# Altium PCB PCB1.PcbDoc
Units mil, origin at the board's own origin, x right, y up, seen from the top; angles counter-clockwise.
Board outline 3100 x 3000 mil, 2 copper layers (Top Layer, Bottom Layer); 61 components, 45 nets, 259 pads, 32 vias.
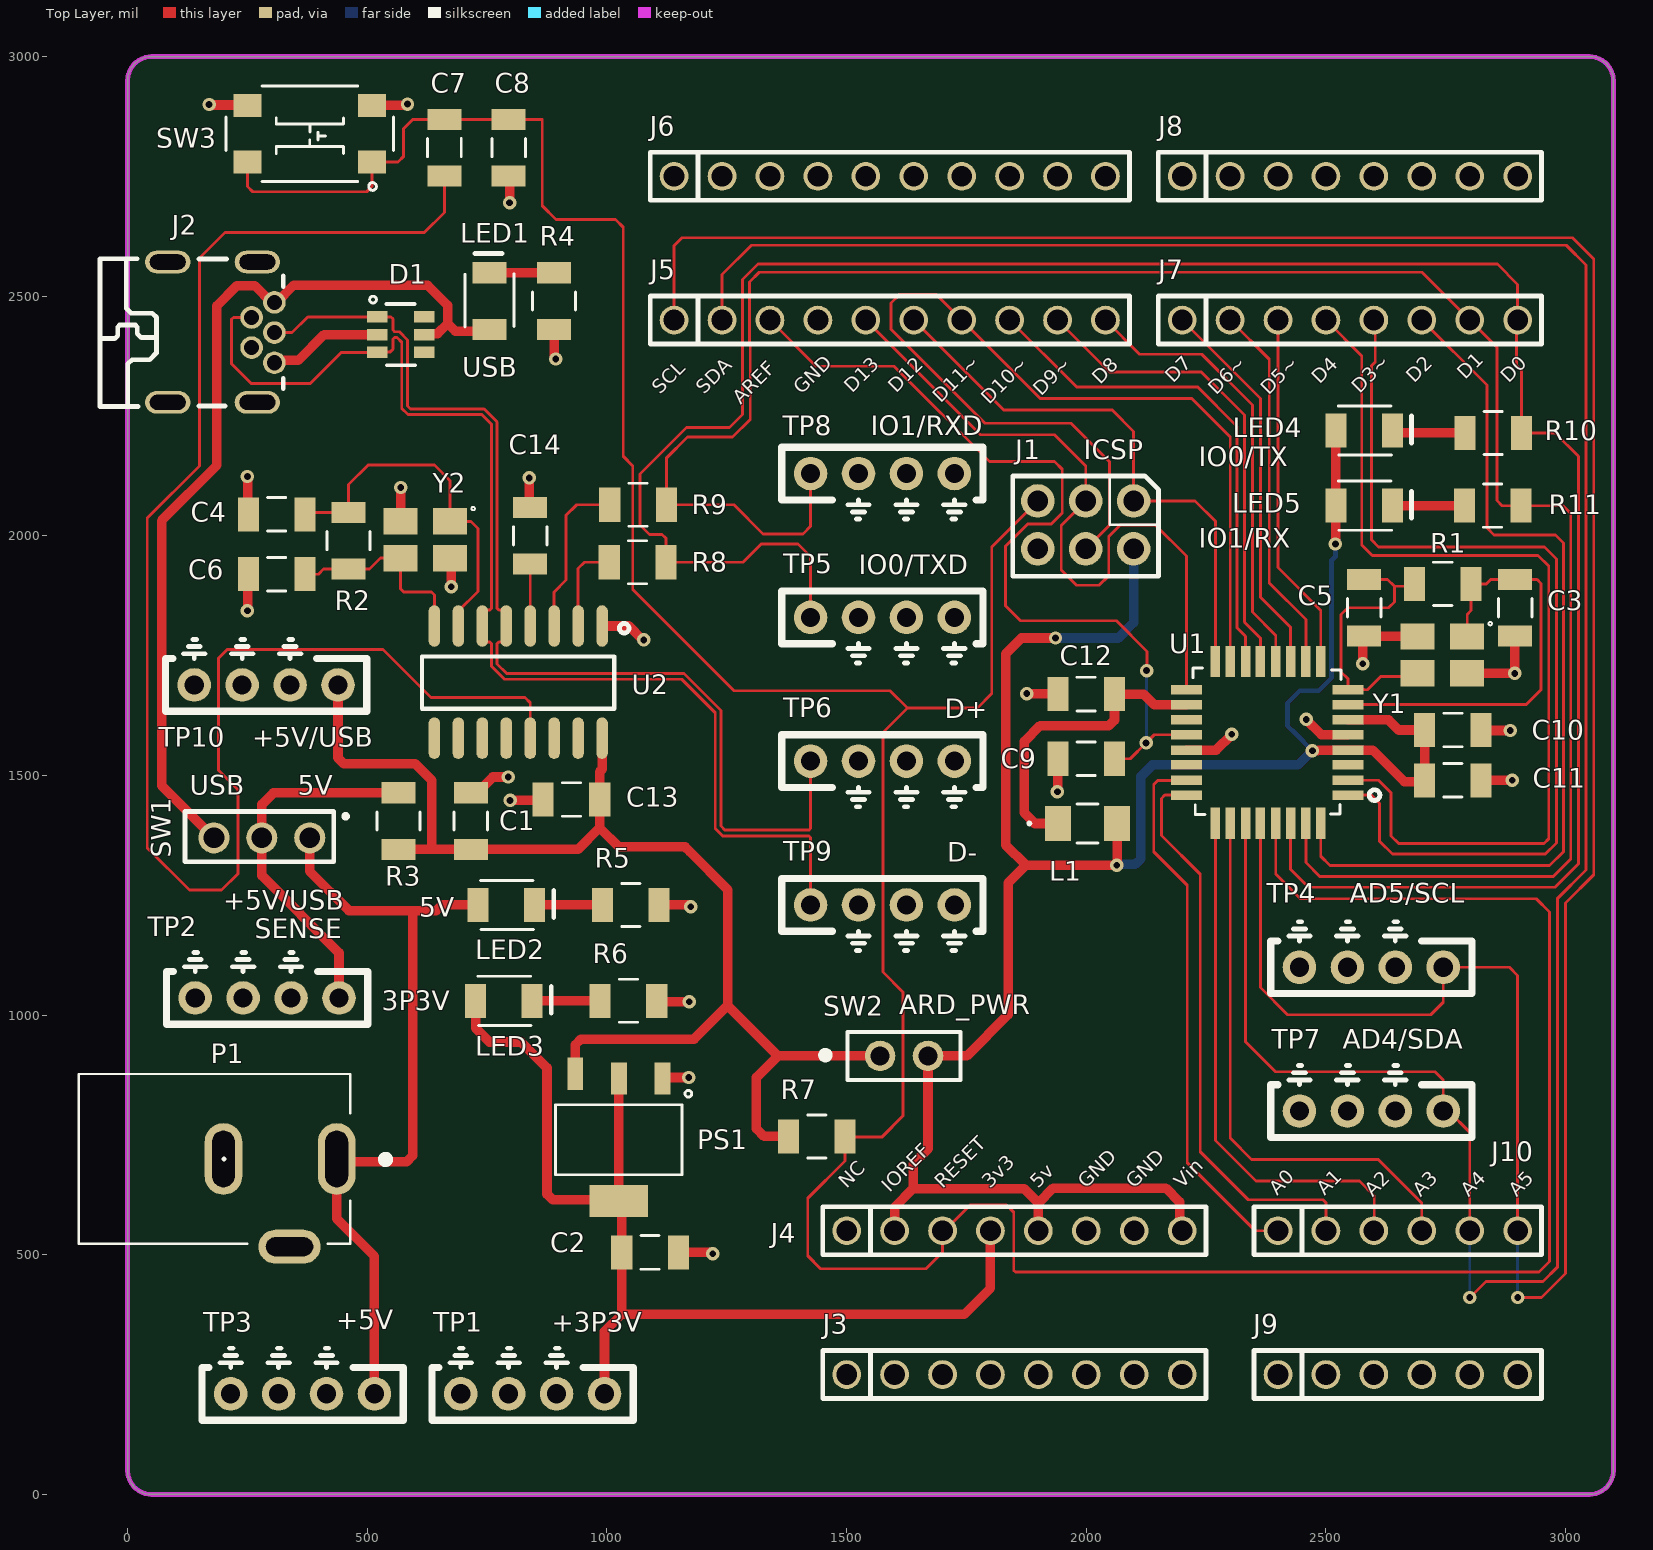
[diagram p0: Top Layer view]
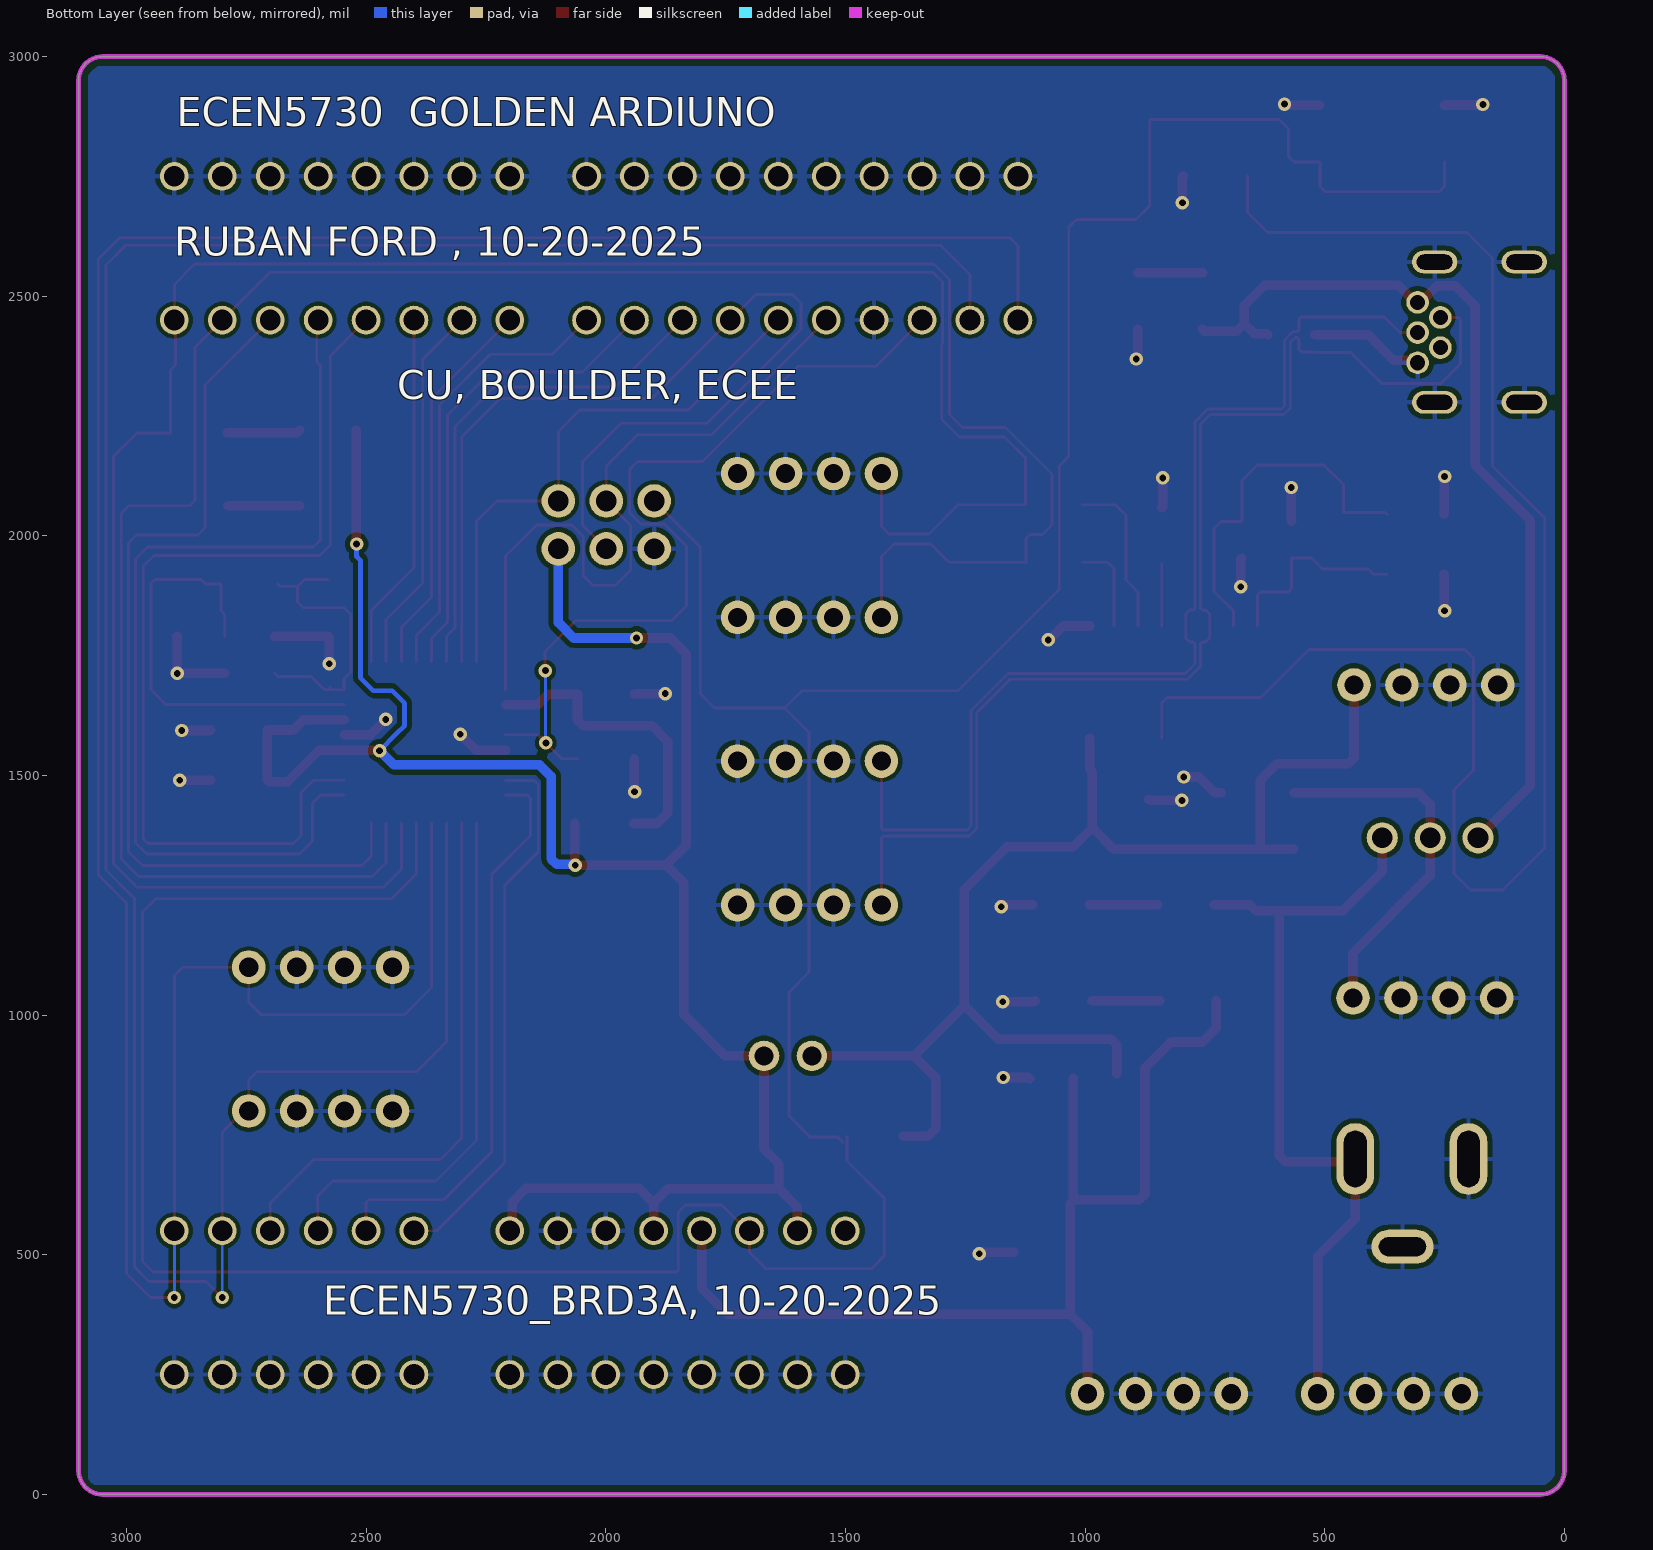
[diagram p1: Bottom Layer view, seen from below]
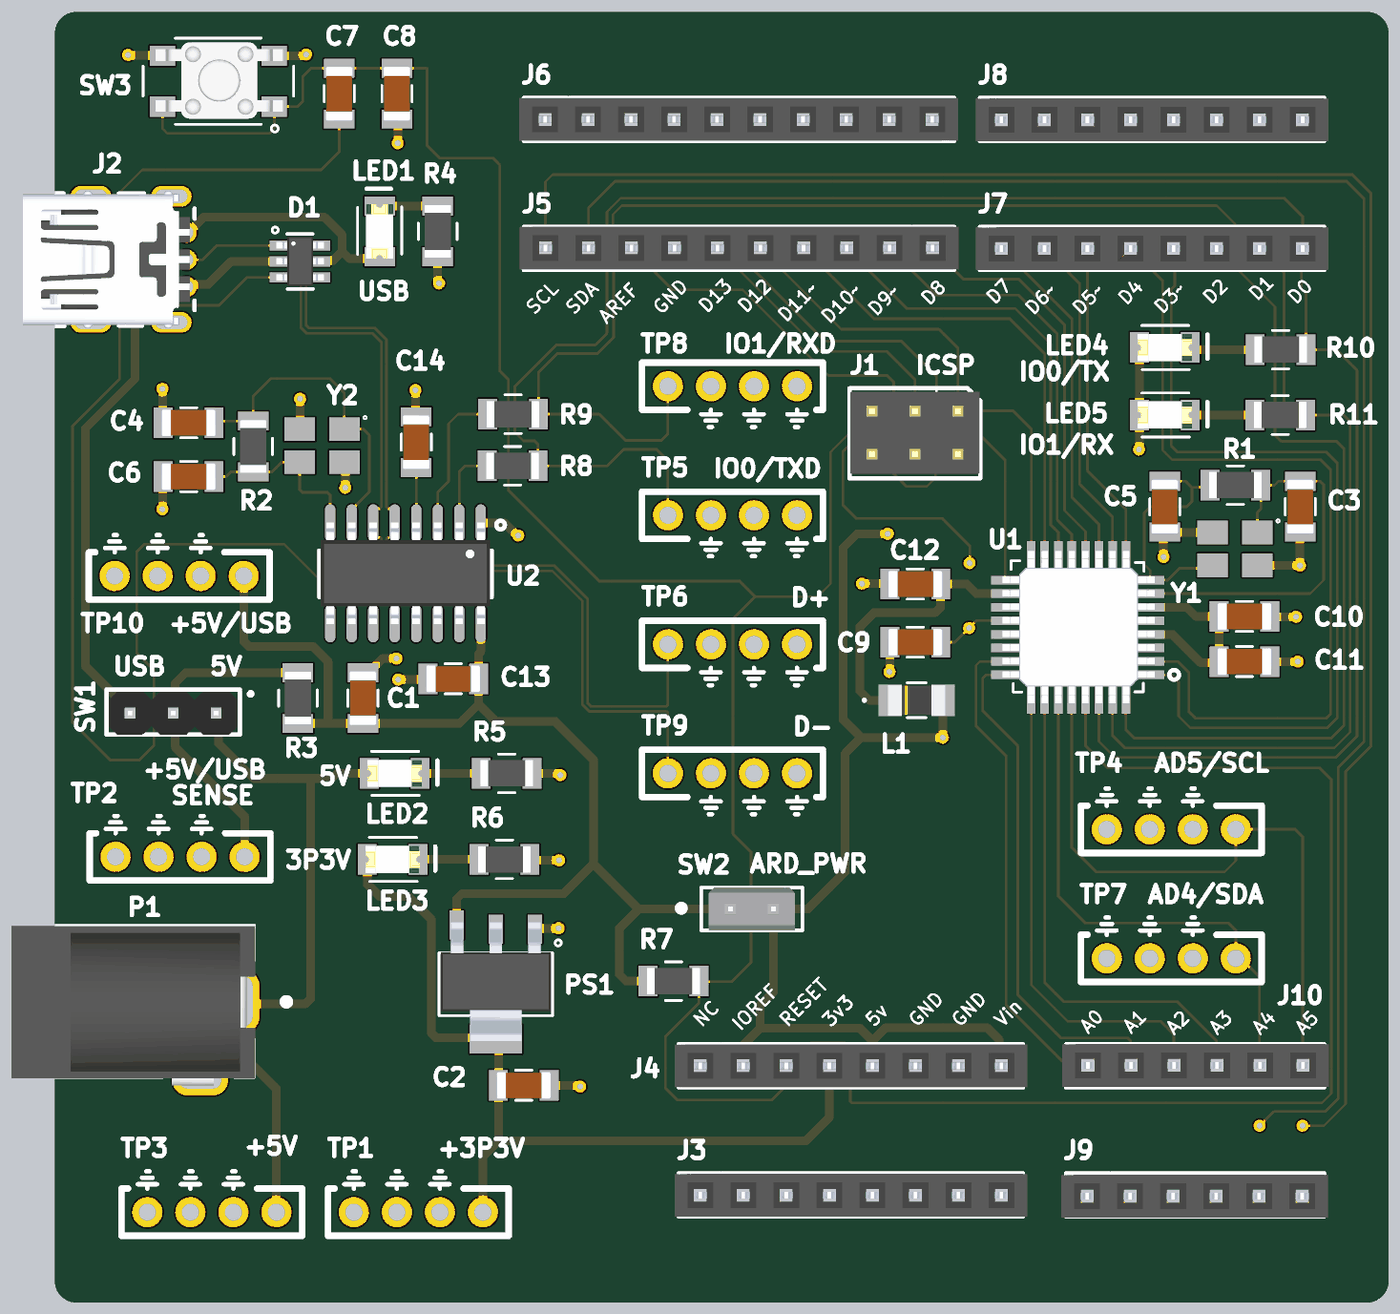
[diagram p2: 3D render of the assembled board from above, using the file's embedded part models]

## Layer stack, top to bottom
Top Solder: solder mask 0.4, Solder Resist, Dk 3.5
Top Layer: signal copper 1.4
Dielectric 1: dielectric 12.6, FR-4, Dk 4.8
Bottom Layer: signal copper 1.4
Bottom Solder: solder mask 0.4, Solder Resist, Dk 3.5

## Board outline
0,50 ccw(c50,50) 50,0 3050,0 ccw(c3050,50) 3100,50 3100,2950 ccw(c3050,2950) 3050,3000 50,3000 ccw(c50,2950) 0,2950

## Design rules (kind name [scope] priority, off if disabled: settings)
AssemblyTestPointUsage [All] p1: isadvanced=TRUE
AssemblyTestpoint [All] p1: isadvanced=TRUE testpointundercomponent=TRUE minsize=40 maxsize=100 preferedsize=60 minholesize=0 maxholesize=40 preferedholesize=32 testpointgrid=1 usegrid=TRUE gridtolerance=0.01 allowsidetop=TRUE allowsidebottom=TRUE
Clearance Clearance_1 [InNetClass('POWER') And OnMid vs InNetClass('default') And OnMid] p1: gap=8 ignorepadtopadclearanceinfootprint=FALSE except(10: Arc-THPad Arc-Via Arc-Hole Track-THPad Track-Via Track-Hole THPad-Text Via-Text Text-Hole) sourcerule=56 cellrowname=POWER cellrowtype=2 cellcolname=default cellcoltype=2 innerlayers=TRUE
Clearance Clearance_2 [InNetClass('POWER') And (ExistsOnLayer('Top Layer') Or ExistsOnLayer('Bottom Layer')) vs InNetClass('default') And (ExistsOnLayer('Top Layer') Or ExistsOnLayer('Bottom Layer'))] p2: gap=8 ignorepadtopadclearanceinfootprint=FALSE except(10: Arc-THPad Arc-Via Arc-Hole Track-THPad Track-Via Track-Hole THPad-Text Via-Text Text-Hole) sourcerule=56 cellrowname=POWER cellrowtype=2 cellcolname=default cellcoltype=2 outerlayers=TRUE
Clearance Clearance_3 [InNetClass('POWER') vs InNetClass('default')] p3: gap=10 ignorepadtopadclearanceinfootprint=FALSE sourcerule=56 cellrowname=POWER cellrowtype=2 cellcolname=default cellcoltype=2
Clearance Clearance_1 [InNetClass('default') And OnMid vs OnMid] p4: gap=8 ignorepadtopadclearanceinfootprint=FALSE sourcerule=56 cellrowname=default cellrowtype=2 cellcolname=All cellcoltype=0 innerlayers=TRUE
Clearance Clearance_2 [InNetClass('default') And (ExistsOnLayer('Top Layer') Or ExistsOnLayer('Bottom Layer')) vs (ExistsOnLayer('Top Layer') Or ExistsOnLayer('Bottom Layer'))] p5: gap=8 ignorepadtopadclearanceinfootprint=FALSE sourcerule=56 cellrowname=default cellrowtype=2 cellcolname=All cellcoltype=0 outerlayers=TRUE
Clearance Clearance_3 [InNetClass('default')] p6: gap=10 ignorepadtopadclearanceinfootprint=FALSE sourcerule=56 cellrowname=default cellrowtype=2 cellcolname=All cellcoltype=0
Clearance Clearance_1 [InNetClass('default') And OnMid vs InNetClass('default') And OnMid] p7: gap=8 ignorepadtopadclearanceinfootprint=FALSE except(10: Arc-THPad Arc-Via Arc-Hole Track-THPad Track-Via Track-Hole THPad-Text Via-Text Text-Hole) sourcerule=56 cellrowname=default cellrowtype=2 cellcolname=default cellcoltype=2 innerlayers=TRUE
Clearance Clearance_2 [InNetClass('default') And (ExistsOnLayer('Top Layer') Or ExistsOnLayer('Bottom Layer')) vs InNetClass('default') And (ExistsOnLayer('Top Layer') Or ExistsOnLayer('Bottom Layer'))] p8: gap=8 ignorepadtopadclearanceinfootprint=FALSE except(10: Arc-THPad Arc-Via Arc-Hole Track-THPad Track-Via Track-Hole THPad-Text Via-Text Text-Hole) sourcerule=56 cellrowname=default cellrowtype=2 cellcolname=default cellcoltype=2 outerlayers=TRUE
Clearance Clearance_3 [InNetClass('default') vs InNetClass('default')] p9: gap=10 ignorepadtopadclearanceinfootprint=FALSE sourcerule=56 cellrowname=default cellrowtype=2 cellcolname=default cellcoltype=2
Clearance Clearance_1 [OnMid vs OnMid] p10: gap=10 ignorepadtopadclearanceinfootprint=FALSE sourcerule=56 cellrowname=All cellrowtype=0 cellcolname=All cellcoltype=0 innerlayers=TRUE
Clearance Clearance_2 [(ExistsOnLayer('Top Layer') Or ExistsOnLayer('Bottom Layer')) vs (ExistsOnLayer('Top Layer') Or ExistsOnLayer('Bottom Layer'))] p11: gap=10 ignorepadtopadclearanceinfootprint=FALSE sourcerule=56 cellrowname=All cellrowtype=0 cellcolname=All cellcoltype=0 outerlayers=TRUE
Clearance [All] p12: gap=10 ignorepadtopadclearanceinfootprint=FALSE ismatrix=TRUE miname0=default mitype0=2 miname1=POWER mitype1=2
ComponentClearance [All] p1: isadvanced=TRUE gap=10 collisioncheckmode=3 verticalgap=10 showdistances=FALSE
DiffPairsRouting DifferentialPairsRouting_1 [InDifferentialPairClass('All Differential Pairs')] p1: maxlimit=6 minlimit=6 mostfreqgap=6 toplayer_minwidth=6 toplayer_maxwidth=6 toplayer_prefwidth=6 bottomlayer_minwidth=6 bottomlayer_maxwidth=6 bottomlayer_prefwidth=6 maxuncoupledlength=500
DiffPairsRouting [All] p2: maxlimit=10 minlimit=10 mostfreqgap=10 toplayer_minwidth=15 toplayer_maxwidth=15 toplayer_prefwidth=15 bottomlayer_minwidth=15 bottomlayer_maxwidth=15 bottomlayer_prefwidth=15 maxuncoupledlength=500
FabricationTestPointUsage [All] p1: isadvanced=TRUE valid=0 allowmultiple=FALSE
FabricationTestpoint [All] p1: isadvanced=TRUE side=3 testpointundercomponent=TRUE minsize=40 maxsize=100 preferedsize=60 minholesize=0 maxholesize=40 preferedholesize=32 testpointgrid=1 allowsidetop=TRUE allowsidebottom=TRUE usegrid=TRUE gridtolerance=0.01
FanoutControl Fanout_BGA [IsBGA] p1: isadvanced=TRUE bgadir=Out bgaviamode=Centered fanoutstyle=Auto fanoutdirection=Alternating viagrid=1 // Fanout_BGA (Default Rule)
FanoutControl Fanout_LCC [IsLCC] p2: isadvanced=TRUE bgadir=Out bgaviamode=Centered fanoutstyle=Auto fanoutdirection=Alternating viagrid=1 // Fanout_LCC (Default Rule)
FanoutControl Fanout_SOIC [IsSOIC] p3: isadvanced=TRUE bgadir=Out bgaviamode=Centered fanoutstyle=Auto fanoutdirection=Alternating viagrid=1 // Fanout_SOIC (Default Rule)
FanoutControl Fanout_Small [(CompPinCount < 5)] p4: isadvanced=TRUE bgadir=Out bgaviamode=Centered fanoutstyle=Auto fanoutdirection=OutThenIn viagrid=1 // Fanout_Small (Default Rule)
FanoutControl Fanout_Default [All] p5: isadvanced=TRUE bgadir=Out bgaviamode=Centered fanoutstyle=Auto fanoutdirection=Alternating viagrid=1 // Fanout_Default (Default Rule)
Height [All] p1: isadvanced=TRUE minheight=0 maxheight=1000 prefheight=500
HoleSize [All] p1: isadvanced=TRUE absolutevalues=TRUE maxlimit=100 minlimit=1 maxpercent=80.000 minpercent=20.000
HoleToHoleClearance [All] p1: isadvanced=TRUE gap=10 allowstackedmicrovias=TRUE
LayerPairs [All] p1: isadvanced=TRUE enforce=TRUE
MinimumSolderMaskSliver [All] p1: isadvanced=TRUE minsoldermaskwidth=7
NetAntennae [All] p1: isadvanced=TRUE netantennaetolerance=0
PasteMaskExpansion [All] p1: isadvanced=TRUE expansion=0
PlaneClearance [All] p1: isadvanced=TRUE clearance=20
PlaneConnect [All] p1: isadvanced=TRUE pad.planeconnectstyle=Relief pad.reliefexpansion=20 pad.reliefentries=4 pad.reliefconductorwidth=10 pad.reliefairgap=10 via.planeconnectstyle=Direct via.reliefexpansion=20 via.reliefentries=4 via.reliefconductorwidth=10 via.reliefairgap=10
PolygonConnect [All] p1: thpad.connectstyle=Relief thpad.reliefconductorwidth=10 thpad.reliefentries=4 thpad.polygonreliefangle="90 Angle" thpad.airgapwidth=10 smdpad.connectstyle=Relief smdpad.reliefconductorwidth=10 smdpad.reliefentries=4 smdpad.polygonreliefangle="90 Angle" smdpad.airgapwidth=10 via.connectstyle=Direct via.reliefconductorwidth=10 via.reliefentries=4 via.polygonreliefangle="90 Angle" via.airgapwidth=10
RoutingCorners [All] p1: isadvanced=TRUE cornerstyle=45-Degree minsetback=100 maxsetback=100
RoutingPriority [All] p1: isadvanced=TRUE routingpriority=0
RoutingVias [All] p1: holewidth=14 width=28 viastyle="Through Hole" minholewidth=14 minwidth=28 maxholewidth=14 maxwidth=28
ShortCircuit [All] p1: isadvanced=TRUE allowed=FALSE
SilkToSilkClearance [All] p1: isadvanced=TRUE silktosilkclearance=10
SilkToSolderMaskClearance [IsPad] p1: isadvanced=TRUE minsilkscreentomaskgap=6 clearancetoexposedcopper=TRUE
SolderMaskExpansion [All] p1: isadvanced=TRUE expansion=4 istentingtop=FALSE
SupplyNets "Schematic Supply Nets_7" [InNet('+5/USB_SENSE')] p1: isadvanced=TRUE voltage=0.000
SupplyNets "Schematic Supply Nets_6" [InNet('+5V')] p2: isadvanced=TRUE voltage=0.000
SupplyNets "Schematic Supply Nets_5" [InNet('GND')] p3: isadvanced=TRUE voltage=0.000
SupplyNets "Schematic Supply Nets_4" [InNet('+ARDPWR')] p4: isadvanced=TRUE voltage=0.000
SupplyNets "Schematic Supply Nets_2" [InNet('+3P3V')] p5: isadvanced=TRUE voltage=0.000
SupplyNets "Schematic Supply Nets_1" [InNet('+5/USB')] p6: isadvanced=TRUE voltage=0.000
SupplyNets "Schematic Supply Nets" [InNet('+USB_VCC')] p7: isadvanced=TRUE voltage=0.000
UnRoutedNet [All] p1: isadvanced=TRUE checkbadconnections=TRUE
UnpouredPolygon [All] p1: isadvanced=TRUE
Width MaxMinWidth_3 [InNet('+ARDPWR')] p1: maxlimit=20 minlimit=10 preferedwidth=20 minimp=50.000000 maximp=50.000000 favimp=50.000000
Width MaxMinWidth_1 [InNetClass('default')] p2: maxlimit=6 minlimit=6 preferedwidth=6 minimp=50.000000 maximp=50.000000 favimp=50.000000
Width MaxMinWidth_2 [InNetClass('POWER')] p3: maxlimit=20 minlimit=20 preferedwidth=20 minimp=50.000000 maximp=50.000000 favimp=50.000000
Width [All] p4: maxlimit=10 minlimit=10 preferedwidth=10
3 further rules are at their usual default settings.

## Classes and differential pairs
net class default: AD0 AD1 AD2 AD3 AD4/SDA AD5/SCL AREF CXTAL1 CXTAL2 D+ D- DTR IO0 IO1 IO2 IO3 IO4 IO5 IO6 IO7 IO8 IO9 MISO MOSI NetC14_2 RESET RXD SCK SS TXD XTAL1 XTAL2
net class POWER: +3P3V +5/USB +5/USB_SENSE +5V +ARDPWR +AVCC +USB_VCC GND NetLED1_2 NetLED2_2 NetLED3_2 NetLED4_2 NetLED5_2
differential pair D_D: +D+ -D-

## Components (designator, comment, footprint, x,y, rotation, side; value= is the part's Value field where it differs from the comment)
C1 "22uF" 1206_Passive_Capacitor 716,1405 r270 top
C2 "22uF" 1206_Passive_Capacitor 1090,505 r180 top
C3 "22pF" 1206_Passive_Capacitor 2895,1850 r90 top
C4 "22pF" 1206_Passive_Capacitor 311,2045 r0 top
C5 "22pF" 1206_Passive_Capacitor 2580,1850 r90 top
C6 "22pF" 1206_Passive_Capacitor 311,1920 r0 top
C7 "1uF" 1206_Passive_Capacitor 661,2810 r270 top
C8 "47nF" 1206_Passive_Capacitor 795,2810 r90 top
C9 "22uF" 1206_Passive_Capacitor 2000,1535 r0 top
C10 "22uF" 1206_Passive_Capacitor 2765,1595 r180 top
C11 "22uF" 1206_Passive_Capacitor 2765,1490 r180 top
C12 "22uF" 1206_Passive_Capacitor 2000,1670 r0 top
C13 "22uF" 1206_Passive_Capacitor 926,1450 r0 top
C14 "22uF" 1206_Passive_Capacitor 840,2000 r270 top
D1 "TESD5V0V4UCX6" "TVS - TESD" 570,2420 r0 top value="TVS DIODE 5.5V 6TSOP"
J1 "NRPN032PAEN-RC" ICSP 2099,2073 r270 top locked
J2 "USB Mini" USB_MINI_B 195,2425 r270 top value="USB mini B"
J3 "PPTC081LFBN-RC" "8_PIN_100MIL - Female" 1500.25,250.25 r0 top locked value=Female
J4 "PPTC081LFBN-RC" 8_PIN_ARD-PWR_100MIL 1500.25,550.25 r0 top locked value=Female
J5 "PPTC101LFBN-RC" 10_PIN_ARDUINO_100MIL 1140.25,2450.25 r0 top locked value=Female
J6 "PPTC101LFBN-RC" "10_PIN_100MIL - Female" 1140.25,2750.25 r0 top locked value=Female
J7 "PPTC081LFBN-RC" 8_PIN_ARD-DIG_100MIL 2200.25,2450.25 r0 top locked value=Female
J8 "PPTC081LFBN-RC" "8_PIN_100MIL - Female" 2200.25,2750.25 r0 top locked value=Female
J9 "PPTC061LFBN-RC" "6_PIN_100MIL -Female" 2400.25,250.25 r0 top locked value=Female
J10 "PPTC061LFBN-RC" 6_PIN_ARD-Analog_100mil 2400.25,550.25 r0 top locked value=Female
L1 "FB_10uH_1206" AIML-1206_ABR-M 2003,1400 r0 top
LED1 "Red" LED_1206 755,2490 r90 top
LED2 "Red" LED_1206 790,1230 r0 top
LED3 "Red" LED_1206 785,1030 r0 top
LED4 "Red" LED_1206 2580,2220 r0 top
LED5 "Red" LED_1206 2580,2063 r0 top
P1 "Power Jack" Power_Jack 436.22,700 r180 top value="CONN PWR JACK 2X5.5MM SOLDER"
PS1 "AMS1117-3.3" LDO 1025,740 r180 top value="IC REG LINEAR 3.3V 800MA SOT223"
R1 "1M" 1206_Passive_Resitor 2744,1900 r180 top value="1M Ohm"
R2 "1M" 1206_Passive_Resitor 461,1990 r270 top value="1M Ohm"
R3 "500m" 1206_Passive_Resitor 565,1405 r270 top value=500mOhm
R4 "1k" 1206_Passive_Resitor 890,2490 r90 top value="1K Ohm"
R5 "1k" 1206_Passive_Resitor 1050,1230 r180 top value="1K Ohm"
R6 "1k" 1206_Passive_Resitor 1045,1030 r180 top value="1K Ohm"
R7 "10k" 1206_Passive_Resitor 1438,747 r180 top value=10KOhm
R8 "1k" 1206_Passive_Resitor 1064,1945 r180 top value="1K Ohm"
R9 "1k" 1206_Passive_Resitor 1065,2065 r180 top value="1K Ohm"
R10 "1k" 1206_Passive_Resitor 2849,2215 r180 top value="1K Ohm"
R11 "1k" 1206_Passive_Resitor 2848,2063 r180 top value="1K Ohm"
SW1 "PREC003SAAN-RC" 3_PIN_100mil 380,1370 r180 top value="CONN HEADER VERT 3POS 2.54MM"
SW2 "SW_2Pin_100mil_Switch" 2Pin-Header-Conn 1570,915 r0 top
SW3 "TL3305AF160QG" Switch_JLC 380.08,2839.06 r180 top
TP1 "10x Probe TP" TP10x_Probe 845,210 r180 top
TP2 "10x Probe TP" TP10x_Probe 291,1036 r180 top
TP3 "10x Probe TP" TP10x_Probe 365,210 r180 top
TP4 "10x Probe TP" TP10x_Probe 2595,1100 r180 top
TP5 "10x Probe TP" TP10x_Probe 1575,1830 r0 top
TP6 "10x Probe TP" TP10x_Probe 1575,1530 r0 top
TP7 "10x Probe TP" TP10x_Probe 2595,800 r180 top
TP8 "10x Probe TP" TP10x_Probe 1575,2130 r0 top
TP9 "10x Probe TP" TP10x_Probe 1575,1230 r0 top
TP10 "10x Probe TP" TP10x_Probe 289,1689 r180 top
U1 "ATMEGA328P-ANR" ATMega328P 2377.62,1569.08 r0 top locked value="IC MCU 8BIT 32KB FLASH 32TQFP"
U2 "CH340G" "USB to serial" 815,1695 r180 top value="USB to Serial"
Y1 "X322516MLB4SI" "Crystal resonator" 2743.03,1749.84 r180 top value=16MHz
Y2 "X322512MSB4SI" "Crystal resonator" 621,1990 r180 top value=12MHz

## Footprints (in the part's own frame and the unit in brackets; to place one, negate y for a bottom-side part, rotate by r counter-clockwise, add the part's x,y. Pads: shape width x height; smd on the part's side, far side on the other; paste and mask are expansions set on the pad)
2Pin-Header-Conn [mm]
  round 1.62 hole 1.02: 1(0,0) 2(2.54,0)
  silkscreen extent -3.02,-1.27 4.26,1.26, body extent -1.27,-1.27 3.81,1.27, height 8.13
3_PIN_100mil [mm]
  round 1.65 hole 1.1: 1(0,0) 2(2.54,0) 3(5.08,0)
  silkscreen extent -2,-1.4 6.6,1.27, body extent -1.14,-1.27 6.48,1.27, height 8.38
"6_PIN_100MIL -Female" [mil]
  round 60 hole 43.31: 1(0,0) 2(100,0) 3(200,0) 4(300,0) 5(400,0) 6(500,0)
  silkscreen extent -50,-50 550,50, body extent -61,-53 559,47, height 335
6_PIN_ARD-Analog_100mil [mil]
  round 60 hole 43.31: 1(0,0) 2(100,0) 3(200,0) 4(300,0) 5(400,0) 6(500,0)
  silkscreen extent -50,-50 550,50, body extent -59,-49 561,51, height 335
"8_PIN_100MIL - Female" [mil]
  round 60 hole 43.31: 1(0,0) 2(100,0) 3(200,0) 4(300,0) 5(400,0) 6(500,0) 7(600,0) 8(700,0)
  silkscreen extent -50,-50 750,50, body extent -60,-51 760,49, height 335
8_PIN_ARD-DIG_100MIL [mil]
  round 60 hole 43.31: 1(0,0) 2(100,0) 3(200,0) 4(300,0) 5(400,0) 6(500,0) 7(600,0) 8(700,0)
  silkscreen extent -50,-50 750,50, body extent -60,-50 760,50, height 335
8_PIN_ARD-PWR_100MIL [mil]
  round 60 hole 43.31: 1(0,0) 2(100,0) 3(200,0) 4(300,0) 5(400,0) 6(500,0) 7(600,0) 8(700,0)
  silkscreen extent -50,-50 750,50, body extent -60,-50 760,50, height 335
"10_PIN_100MIL - Female" [mil]
  round 60 hole 43.31: 1(0,0) 2(100,0) 3(200,0) 4(300,0) 5(400,0) 6(500,0) 7(600,0) 8(700,0) 9(800,0) 10(900,0)
  silkscreen extent -50,-50 950,50, body extent -61,-50 959,50, height 335
10_PIN_ARDUINO_100MIL [mil]
  round 60 hole 43.31: 1(0,0) 2(100,0) 3(200,0) 4(300,0) 5(400,0) 6(500,0) 7(600,0) 8(700,0) 9(800,0) 10(900,0)
  silkscreen extent -50,-50 950,50, body extent -60,-49 960,51, height 335
1206_Passive_Capacitor [mil]
  rect 44x71 smd: 1(-59,0) 2(59,0)
  silkscreen extent -19,-35 19,35, body extent -63,-31 63,32, height 50
1206_Passive_Resitor [mil]
  rect 44x71 smd: 1(-59,0) 2(59,0)
  silkscreen extent -19,-45 19,45, body extent -61,-31 61,31, height 26
AIML-1206_ABR-M [mil]
  rect 54x73 smd paste+0 mask+0: 1(-61.5,0) 2(61.5,0)
  silkscreen extent -124,-40 22,40, body extent -66,-36 66,36, height 55
ATMega328P [mm]
  rect 1.65x0.508 smd mask+0.025: 1(4.28,-2.794) 2(4.28,-2.007) 3(4.28,-1.194) 4(4.28,-0.406) 5(4.28,0.406) 6(4.28,1.194) 7(4.28,2.007) 8(4.28,2.794) 17(-4.28,2.794) 18(-4.28,2.007) 19(-4.28,1.194) 20(-4.28,0.406) 21(-4.28,-0.406) 22(-4.28,-1.194) 23(-4.28,-2.007) 24(-4.28,-2.794)
  rect 0.508x1.65 smd mask+0.025: 9(2.843,4.28) 10(2.056,4.28) 11(1.243,4.28) 12(0.455,4.28) 13(-0.357,4.28) 14(-1.145,4.28) 15(-1.958,4.28) 16(-2.745,4.28) 25(-2.745,-4.28) 26(-1.958,-4.28) 27(-1.145,-4.28) 28(-0.357,-4.28) 29(0.455,-4.28) 30(1.243,-4.28) 31(2.056,-4.28) 32(2.843,-4.28)
  silkscreen extent -3.94,-3.81 5.97,3.94, body extent -4.45,-4.47 4.55,4.53, height 1.16
"Crystal resonator" [mm]
  rect 1.8x1.4 smd: 1(-1.32,-1.02) 2(1.32,-1.02) 3(1.32,0.92) 4(-1.32,0.92)
  silkscreen extent -2.63,-1.79 -2.45,-1.61, body extent -1.65,-1.2 1.65,1.2, height 0.8
ICSP [mil]
  round 70 hole 43.31: 1(0,0) 2(0,-100) 3(0,-200) 4(100,0) 5(100,-100) 6(100,-200)
  silkscreen extent -52,-252 157,52, body extent -44,-250 146,50, height 330
LDO [mm]
  rect 0.838x1.7 smd: 1(-2.311,-3.25) 2(0,-3.25) 3(2.311,-3.5)
  rect 3.099x1.7 smd: 4(0,3.25)
  silkscreen extent -3.86,-2.62 3.35,1.85, body extent -3.25,-3.65 3.25,3.35, height 1.85
LED_1206 [mil]
  rect 44x71 smd: 1(-59,0) 2(59,0)
  silkscreen extent -54,-51 99,51, body extent -63,-31 63,31, height 28
Power_Jack [mm]
  oval 2x3.8 hole 1.2 slot 3 at 90 deg: 1(0,0) 2(6,0)
  oval 3.3x1.8 hole 1 slot 2.5 at 0 deg: 3(2.5,4.65)
  silkscreen extent -2.79,-4.5 13.68,4.5, body extent -0.76,-4.45 13.64,4.95, height 11.49
Switch_JLC [mm]
  rect 1.5x1.2 smd: 1(-3.3,1.5) 2(3.3,1.5) 3(-3.3,-1.5) 4(3.3,-1.5)
  silkscreen extent -4.44,-2.54 4.45,3, body extent -3.8,-2.29 3.7,2.21, height 3.7
TP10x_Probe [mil] "Small Probs footprint"
  round 70 hole 40: 1(-150,0) 2(-50,0) 2(50,0) 2(150,0)
  silkscreen extent -210,-95 210,55
"TVS - TESD" [mil] "TVS DIODE 5VWM 15VC SOT26"
  rect 43x24 smd mask+3: 1(-49,37) 2(-49,0) 3(-49,-37) 4(49,-37) 5(49,0) 6(49,37)
  silkscreen extent -65,-64 30,80, body extent -55,-57 55,57, height 57
"USB to serial" [mil]
  oval 24x86.61 smd: 1(-175,-117) 2(-125,-117) 3(-75,-117) 4(-25,-117) 5(25,-117) 6(75,-117) 7(125,-117) 8(175,-117) 9(175,117) 10(125,117) 11(75,117) 12(25,117) 13(-25,117) 14(-75,117) 15(-125,117) 16(-175,117)
  silkscreen extent -231,-122 201,56, body extent -197,-118 197,118, height 71
USB_MINI_B [mm]
  round 1.2 hole 0.8: 1(-1.58,2.826) 2(-0.78,1.622) 3(0.02,2.826) 4(0.82,1.622) 5(1.62,2.826)
  oval 1.2x2.4 hole 0.8 slot 1.9 at 90 deg: 6(-3.72,1.924) 7(3.72,1.924) 8(-3.72,-2.826) 9(3.72,-2.826)
  silkscreen extent -3.89,-6.42 3.93,3.3, body extent -4.04,-6.83 4.06,3.02, height 3.98

## Part data
C1 C2 C9 C10 C11 C12 C13 C14: library part C_22uF_1206, "22uF ±10% 25V X5R 1206 Multilayer Ceramic Capacitors MLCC - SMD/SMT RoHS", LCSC Part#=C12891, MFR Part #=CL31A226KAHNNNE, Datasheet=https://datasheet.lcsc.com/lcsc/1811031514_Samsung-Electro-Mechanics-CL31A226KAHNNNE_C12891.pdf, Type=basic
C3 C4 C5 C6: library part C_22pF_1206, "22pF ±5% 1kV C0G 1206 Multilayer Ceramic Capacitors MLCC - SMD/SMT RoHS", LCSC Part#=C107174, MFR Part #=CC1206JKNPOCBN220, Datasheet=https://datasheet.lcsc.com/lcsc/1810241219_YAGEO-CC1206JKNPOCBN220_C107174.pdf, Type=Extended
C7: library part C_1uF_1206, "MULTILAYER CERAMIC CAPACITORS MLCC - SMD/SMT 1UF 50V 1206 ROHS", LCSC Part#=C1848, MFR Part #=CL31B105KBHNNNE, Digikey Link=https://www.digikey.com/product-detail/en/C1206C105M4RACTU/399-8150-1-ND/3471873/?itemSeq=304982366, Type=Basic
C8: library part C_47nF_1206, "47nF ±5% 50V C0G 1206 Multilayer Ceramic Capacitors MLCC - SMD/SMT RoHS", LCSC Part#=C21812, MFR Part #=GRM31M5C1H473JA01L, Datasheet=https://datasheet.lcsc.com/lcsc/1810201313_Murata-Electronics-GRM31M5C1H473JA01L_C21812.pdf, Type=Extended
D1: library part D_TVS_Diode_TESD, "TVS SOT-23 ROHS", LCSC Part#=C5289077, Datasheet=https://www.lcsc.com/datasheet/C5289077.pdf, MFR Part #=TESD5V0V4UCX6, Type=Basic
J1: library part J_ICSP, "Connector Header Through Hole 6 position 0.079\" (2.00mm)", LCSC Part#=C124384, Digikey Link=https://www.digikey.com/product-detail/en/NRPN032PAEN-RC/S5801-03-ND/804955/?itemSeq=304982355, MFR Part #=NRPN032PAEN-RC, Type=Extended
J2: library part J_USB_B_Mini, "Through Hole USB Connectors RoHS", LCSC Part#=C46398, MFR Part #=920-462A2021D10102, Datasheet=https://datasheet.lcsc.com/szlcsc/2103081233_Jing-Extension-of-the-Electronic-Co-920-462A2021D10102_C46398.pdf, Type=Extended
J3 J8: library part JF_8_PIN_FEMALE, "8 Position Header Connector 0.100\" (2.54mm) Through Hole Tin", LCSC Part#=C27438, Digikey Link=https://www.digikey.com/product-detail/en/PPTC081LFBN-RC/S7006-ND/810147/?itemSeq=304982354, MFR Part #=PPTC081LFBN-RC, Type=Extended
J4: library part JF_8_PIN_FEMA_ARD-Pwr, "8 Position Header Connector 0.100\" (2.54mm) Through Hole Tin", LCSC Part#=C27438, Digikey Link=https://www.digikey.com/product-detail/en/PPTC081LFBN-RC/S7006-ND/810147/?itemSeq=304982354, MFR Part #=PPTC081LFBN-RC, Type=Extended
J5: library part JF_10_PIN_FEMA_ARDUINO, "10 Position Header Connector 0.100\" (2.54mm) Through Hole Tin", LCSC Part#=C225507, Digikey Link=https://www.digikey.com/product-detail/en/PPTC101LFBN-RC/S7008-ND/810149/?itemSeq=304982352, MFR Part #=PPTC101LFBN-RC, Type=Extended
J6: library part JF_10_PIN_FEMALE_, "10 Position Header Connector 0.100\" (2.54mm) Through Hole Tin", LCSC Part#=C225507, Digikey Link=https://www.digikey.com/product-detail/en/PPTC101LFBN-RC/S7008-ND/810149/?itemSeq=304982352, MFR Part #=PPTC101LFBN-RC, Type=Extended
J7: library part JF_8_PIN_FEMA_ARD-Dig, "8 Position Header Connector 0.100\" (2.54mm) Through Hole Tin", LCSC Part#=C27438, Digikey Link=https://www.digikey.com/product-detail/en/PPTC081LFBN-RC/S7006-ND/810147/?itemSeq=304982354, MFR Part #=PPTC081LFBN-RC, Type=Extended
J9: library part JF_6_PIN_FEMALE, "6 Position Header Connector 0.100\" (2.54mm) Through Hole Tin", LCSC Part#=C40877, Digikey Link=https://www.digikey.com/product-detail/en/PPTC061LFBN-RC/S7004-ND/810145/?itemSeq=304982353, MFR Part #=PPTC061LFBN-RC, Type=Extended
J10: library part JF_6_PIN_FEMA_ARD-Anolog, "6 Position Header Connector 0.100\" (2.54mm) Through Hole Tin", LCSC Part#=C40877, Digikey Link=https://www.digikey.com/product-detail/en/PPTC061LFBN-RC/S7004-ND/810145/?itemSeq=304982353, MFR Part #=PPTC061LFBN-RC, Type=Extended
L1: "25mA 10uH ±10% 800mΩ 1206  Inductors (SMD) ROHS", LCSC Part#=C1051, MFR Part #=CMI321609X100KT, Mfr_Name="FH (Guangdong Fenghua Advanced Tech)", Datasheet=https://datasheet.lcsc.com/lcsc/1810311314_FH--Guangdong-Fenghua-Advanced-Tech-CMI321609X100KT_C1051.pdf, Type=Basic
LED1 LED2 LED3 LED4 LED5: library part LED_RED_1206, "Red 621~631nm 1206 Light Emitting Diodes (LED) RoHS", LCSC Part#=C93133, MFR Part #=15-21/R6C-FQ1R1B/2T, Datasheet=https://datasheet.lcsc.com/szlcsc/1811151241_Everlight-Elec-15-21-R6C-FQ1R1B-2T_C93133.pdf, Type=Extended
P1: library part "P_Power Jack", "Power Barrel Connector Jack 2.10mm ID (0.083\"), 5.50mm OD (0.217\") Through Hole, Right Angle", LCSC Part#=C136744, MFR Part #=PJ-102A, Digikey Link=https://www.digikey.com/product-detail/en/PJ-102A/CP-102A-ND/275425/?itemSeq=304982367, Type=Extended
PS1: library part PS_AMS_LDO_3v3, "LOW DROPOUT REGULATORS(LDO) POSITIVE FIXED 1.3V @ 800MA 15V 3.3V 1A SOT-223 ROHS", LCSC Part#=C6186, MFR Part #=AMS1117-3.3, Type=Basic
R1 R2: library part R_1M_1206, "CHIP RESISTOR - SURFACE MOUNT 1MOHMS ±1% 1/4W 1206 ROHS", LCSC Part#=C17927, MFR Part #=RMCF1206JT1M00, Digikey Link=https://www.digikey.com/product-detail/en/RMCF1206JT1M00/RMCF1206JT1M00CT-ND/1942830/?itemSeq=304982358, Type=Basic
R3: library part R_500mOhm_1206, "Resistors/Shunt 250mW 500mΩ ±800ppm/℃ ±5% 1206  Current Sense  Resistors ROHS", LCSC Part#=C247433, MFR Part #=1206W4J050KT5E, Datasheet=https://datasheet.lcsc.com/lcsc/1810301438_UNI-ROYAL-Uniroyal-Elec-1206W4J050KT5E_C247433.pdf, Type=Extended
R4 R5 R6 R8 R9 R10 R11: library part R_1K_1206, "CHIP RESISTOR - SURFACE MOUNT 1KOHMS ±1% 1/4W 1206 ROHS", LCSC Part#=C4410, MFR Part #=RNCP1206FTD1K00CT, Digikey Link=https://www.digikey.com/product-detail/en/RNCP1206FTD1K00/RNCP1206FTD1K00CT-ND/2240675/?itemSeq=304982373, Type=Basic
R7: library part R_10KOhm_1206, "10 kOhms ±5% 0.25W, 1/4W Chip Resistor 1206 (3216 Metric) Automotive AEC-Q200 Thick Film", LCSC Part#=C17902, MFR Part #=RMCF1206FT10K0, Digikey Link=https://www.digikey.com/en/products/detail/stackpole-electronics-inc/RMCF1206FT10K0/1759669, Type=Basic
SW1: library part SW_3Pin_100mil_Switch, "Connector Header Through Hole 3 position 0.100\" (2.54mm)", LCSC Part#=C49257, Digikey Link=https://www.digikey.com/product-detail/en/PREC003SAAN-RC/S1012EC-03-ND/2774851/?itemSeq=304982371, MFR Part #=PREC003SAAN-RC, Type=Extended
SW2: "2Pin Header", LCSC Part#=C124375, Type=Extended
SW3: library part SW_Push_Button_JLC, "Tactile Switch SPST-NO Top Actuated Surface Mount", LCSC Part#=C2837550, MFR Part #=KH-4.5X4.5X4.3H-STM, Datasheet=https://datasheet.lcsc.com/lcsc/2106081532_Shenzhen-Kinghelm-Elec-KH-4.5X4.5X4.3H-STM_C2837550.pdf, Type=Extended
TP1 TP2 TP3 TP4 TP5 TP6 TP7 TP8 TP9 TP10: library part TP_10x_Probe, "Test Point 300 mil centers"
U1: library part U_ATMega328P, "AVR AVR® ATmega Microcontroller IC 8-Bit 20MHz 32KB (16K x 16) FLASH 32-TQFP (7x7)", LCSC Part#=C14877, MFR Part #=ATMEGA328P-AU, Digikey Link=https://www.digikey.com/product-detail/en/ATMEGA328P-ANR/ATMEGA328P-ANRCT-ND/2774230/?itemSeq=304982365, Type=Basic
U2: library part U_USBtoSerial, "Transceiver USB 2.0 2Mbps SOP-16_150mil USB ICs RoHS", LCSC Part#=C14267, Datasheet=https://datasheet.lcsc.com/lcsc/2008191806_WCH-Jiangsu-Qin-Heng-CH340G_C14267.pdf, MFR Part #=CH340G, Type=Basic
Y1: library part X_16Mhz_Res, "±10ppm 16000000Hz -40℃~85℃ 贴片无源晶振 60Ω 9pF SMD3225-4P Crystals ROHS", LCSC Part#=C13738, MFR Part #=X322516MLB4SI, Type=Basic
Y2: library part X_12MHz_Res, "SMD Crystal Resonators 12MHz ±10ppm SMD-3225_4P RoHS", LCSC Part#=C9002, Datasheet=https://datasheet.lcsc.com/szlcsc/Yangxing-Tech-X322512MSB4SI_C9002.pdf, MFR Part #=X322512MSB4SI, Type=Basic

## Via types
v1: diameter 28, hole 14, Top Layer to Bottom Layer, 32 vias

## Nets (pads, with @x,y where several pads share a name; then routed paths per layer and width w, separated by ;. In a path a pad name is that pad's centre, name@x,y a point inside that pad or via, vN(x,y) a via of type N, cw(c..) or ccw(c..) an arc to the next point about the centre after c; other vN are vias at no path point)
+3P3V: C2.2 J4.4 LED3.1 PS1.2 PS1.4 TP1.1 | length 2246.8
  Top Layer w20: LED3.1 726,973 755,944 821,944 875,890 875,626.72 886.72,615 1022.05,615 PS1.4 ; TP1.1 995,340 1031,376 ; PS1.2 PS1.4 ; J4.4 1800.25,430.25 1746,376 1031,376 ; PS1.4 1031,606.05 C2.2 1031,376
+5/USB: C1.2 C13.2 PS1.3 R3.2 R7.2 SW2.1 TP10.1 U2.16 | length 2719.9
  Top Layer w20: TP10.1 439,1536.72 450.72,1525 600,1525 635,1490 635,1346 ; R3.2 635,1346 ; PS1.3 934,938.28 945.72,950 1182,950 1252,1020 ; U2.16 990,1513 985,1508 C13.2 985,1391 ; R7.2 1328,747 1312,763 1312,870 1357,915 ; SW2.1 1357,915 ; 635,1346 717,1346 790,1346 940,1346 985,1391 ; 985,1391 1025,1351 1163,1351 1172.97,1341.03 1252,1262 1252,1020 ; 1252,1020 1357,915
+5/USB_SENSE: R3.1 SW1.2 TP2.1 | length 765.6
  Top Layer w20: TP2.1 441,1130 280,1291 SW1.2 280,1440 304,1464 R3.1
+5V: LED2.1 P1.1 SW1.1 TP3.1 | length 1660.3
  Top Layer w20: SW1.1 380,1300 461.72,1218.28 595,1218.28 ; TP3.1 515,497 436.22,575.78 P1.1 442.22,694 582,694 595,707 595,1218.28 ; LED2.1 655.72,1230 644,1218.28 595,1218.28
+ARDPWR: C10.2 C11.2 J1.4 J4.2 J4.5 J4.8 L1.2 LED4.1 LED5.1 SW2.2 U1.4 U1.6 | length 4716.8
  Top Layer w20: J4.2 1600.25,599.25 1639,638 1870.31,638 1900.25,608.06 ; 1639,640 1639,690 1670,721 SW2.2 1751,915 1837,1001 1837,1276 1874,1313 ; J4.5 1900.25,608.06 ; v1(1936,1787) 1865,1787 1832,1754 1832,1355 1874,1313 ; L1.2 2064.5,1313.5 v1(2064,1313) 1874,1313 ; J4.8 2195.03,555.47 2195.03,610.25 2166.28,639 1931.19,639 1900.25,608.06 ; v1(2472,1552) 2483,1552 2484.08,1553.08 U1.4 2597.92,1553.08 2664,1487 2703,1487 C11.2 C10.2 2652,1595 2630.92,1616.08 U1.6 ; v1(2520,1983) 2520.5,1983.5 2520.5,2062.5 LED5.1 LED4.1
  Bottom Layer w10: v1(2472,1552) 2437,1587 2420,1604 2420,1651 2446,1677 2485,1677 2512,1704 2512,1949 2520,1957 v1(2520,1983)
  Bottom Layer w20: v1(1936,1787) 2067,1787 2099,1819 J1.4 ; v1(2064,1313) 2065.53,1314.53 2102.28,1314.53 2114,1326.25 2114,1498 2138.08,1522.08 2442.08,1522.08 v1(2472,1552)
+AVCC: C12.2 L1.1 U1.18 | length 648.6
  Top Layer w20: L1.1 1893,1400 1871,1422 1871,1571 1904,1604 2047.28,1604 2059,1615.72 C12.2 2120,1670 2141.92,1648.08 U1.18
+USB_VCC: D1.5 J2.1 LED1.1 SW1.3 | length 1940.6
  Top Layer w20: SW1.3 71,1479 71,2032 186,2147 186,2480 228,2522 265.22,2522 300.01,2487.2 J2.1 310.5,2487.2 346.29,2523 626,2523 668,2481 668,2443 ; D1.5 621,2422 647,2422 668,2443 ; LED1.1 751,2427 684,2427 668,2443
AD0: J10.1 U1.23 | length 1137.8
  Top Layer w6: U1.23 2209.03,1490 2150,1490 2141,1481 2141,1341 2211,1271 2211,692 2352.75,550.25 J10.1
AD1: J10.2 U1.24 | length 1190.4
  Top Layer w6: U1.24 2164.08,1459.08 2157,1452 2157,1375 2238,1294 2238,715 2338,615 2494,615 2500.25,608.75 J10.2
AD2: J10.3 U1.25 | length 1114.5
  Top Layer w6: U1.25 2269.55,738.46 2354,654 2570,654 2601,623 2601,551 J10.3
AD3: J10.4 U1.26 | length 1170.8
  Top Layer w6: U1.26 2300.54,743.46 2345,699 2609.5,699 2700.25,608.25 J10.4
AD4/SDA: J5.2 J10.5 TP7.1 U1.27 | length 5649.6
  Top Layer w6: J5.2 1240.25,2545.25 1301.51,2606.51 3001.49,2606.51 3043,2565 3043,1303 2983,1243 2983,474 2953,444 2834,444 v1@2800.62,410.62 ; U1.27 2332.54,944.46 2395,882 2728,882 2745,865 TP7.1 2756,800 2800.25,755.75 J10.5
  Bottom Layer w6: v1(2800.25,411) J10.5
AD5/SCL: J5.1 J10.6 TP4.1 U1.28 | length 6026.7
  Top Layer w6: J5.1 1140.25,2605.25 1157,2622 3015,2622 3059,2578 3059,1293 3000,1234 3000,461 2950,411 v1(2900.25,411) ; U1.28 2363.54,1057.46 2420,1001 2719,1001 2745,1027 TP4.1 2883,1100 2900.25,1082.75 J10.6
  Bottom Layer w6: v1(2900.25,411) J10.6
AREF: C9.2 J5.3 U1.20 | length 1798.3
  Top Layer w6: J5.3 1436.5,2354 1599,2354 1798,2155 1934,2155 1950.01,2138.99 1950.01,2048.01 1927,2025 1878,2025 1832,1979 1832,1854 1863,1823 2063,1823 2127,1759 2127,1720 v1(2126,1719) ; C9.2 2092,1535 v1(2125,1568) 2142.08,1585.08 U1.20
  Bottom Layer w6: v1(2125,1568) 2126,1569 v1(2126,1719)
CXTAL1: C4.2 R2.1 U2.7 Y2.1 | length 762.6
  Top Layer w6: C4.2 374,2049 R2.1 461,2107 502,2148 640,2148 672.97,2115.03 Y2.1 716.17,2030.16 731,2015.33 731,1884 690,1843 U2.7
CXTAL2: C6.2 R2.2 U2.8 Y2.3 | length 418.2
  Top Layer w6: C6.2 398,1920 409,1931 R2.2 505,1931 527.78,1953.78 Y2.3 569.03,1889.97 576,1883 634,1883 640,1877 U2.8
D+: D1.1 J2.3 TP6.1 U2.5 | length 2273.8
  Top Layer w6: J2.3 343.22,2424.22 376,2457 549.39,2457 553.5,2452.89 553.5,2429.51 557.01,2426 566.96,2426 584,2408.96 584,2271 590,2265 743.97,2265 771,2237.97 771,1849.03 774.51,1845.52 781.69,1845.52 790,1837.21 U2.5 790,1786.79 781.69,1778.48 774.51,1778.48 771,1774.97 771,1733 791,1713 1161,1713 1238.03,1635.97 1238.03,1394.49 1246.51,1386 1421.49,1386 1425,1389.51 TP6.1
D-: D1.3 J2.2 TP9.1 U2.6 | length 2528.4
  Top Layer w6: J2.2 220.72,2455.72 217,2452 217,2359 258.05,2317.95 380.95,2317.95 446,2383 D1.3 522.03,2384.03 547.99,2384.03 553.5,2389.55 553.5,2410.49 557.01,2414 561.99,2414 572,2403.99 572,2266.03 585.03,2253 739,2253 759,2233 759,1849.03 755.49,1845.52 748.31,1845.52 740,1837.21 U2.6 740,1786.79 748.31,1778.48 755.49,1778.48 759,1774.97 759,1728.03 786.03,1701 1156.03,1701 1226.03,1631 1226.03,1389.51 1241.54,1374 1421.49,1374 1425,1370.49 TP9.1
DTR: C7.2 U2.13 | length 3386
  Top Layer w6: C7.2 661,2675 619,2633 203,2633 150,2580 150,2146 41,2037 41,1349 129,1261 196,1261 230,1295 230,1470.44 190,1510.44 190,1745 208,1763 533,1763 633,1663 829,1663 840,1652 U2.13
GND: C1.1 C2.1 C3.1 C4.1 C5.1 C6.1 C8.1 C9.1 C10.1 C11.1 C12.1 C13.1 C14.1 D1.2 J1.6 J2.5 J2.6 J2.7 J2.8 J2.9 J3.1 J3.2 J3.3 J3.4 J3.5 J3.6 J3.7 J3.8 J4.6 J4.7 J5.4 J6.1 J6.2 J6.3 J6.4 J6.5 J6.6 J6.7 J6.8 J6.9 J6.10 J8.1 J8.2 J8.3 J8.4 J8.5 J8.6 J8.7 J8.8 J9.1 J9.2 J9.3 J9.4 J9.5 J9.6 P1.2 P1.3 PS1.1 R4.1 R5.1 R6.1 SW3.3 SW3.4 TP1.2 TP2.2 TP3.2 TP4.2 TP5.2 TP6.2 TP7.2 TP8.2 TP9.2 TP10.2 U1.5 U1.21 U2.1 Y1.2 Y1.4 Y2.2 Y2.4 | length 2211.7
  Top Layer w20: v1(170,2900) 170.94,2899.06 249.21,2899.06 SW3.4 ; v1(250,1844) 251,1845 251,1919 C6.1 ; v1(250,2124) 251,2123 251,2046 C4.1 ; J2.5 311.47,2366.44 356.44,2366.44 410,2420 D1.2 ; SW3.3 578.95,2898.11 581.84,2901 v1(584,2901) ; Y2.2 570,2031.13 v1(570,2101) ; Y2.4 675,1951.75 v1(675,1894) ; C1.1 729.5,1464 741.5,1476 741.5,1476.5 762,1497 v1(794,1497) ; C8.1 797,2749 v1(797,2695) ; v1(798,1448) 865,1448 C13.1 ; v1(838,2121) 838,2061 C14.1 ; R4.1 890,2374.16 893,2371.16 v1(893,2369) ; U2.1 1045.84,1812 1074.84,1783 v1(1077,1783) ; R6.1 1106,1028 v1(1172,1028) ; R5.1 1168.84,1230 1172.84,1226 v1(1175,1226) ; PS1.1 1118.05,870 v1(1171,870) ; C2.1 1215.84,505 1218.84,502 v1(1221,502) ; v1(1876,1671) 1940,1671 C12.1 ; v1(1940,1466) ccw(c1940,1467) 1941,1467 C9.1 ; U1.21 2271.08,1553.08 v1(2304,1586) ; v1(2459,1617) 2490.92,1585.08 U1.5 ; v1(2577,1733) 2577,1788 C5.1 2580.5,1790.5 2690.56,1790.5 Y1.2 ; Y1.4 2795.31,1713.31 2893.69,1713.31 v1(2894,1713) 2894,1790 C3.1 ; C11.1 v1(2889,1490) ; C10.1 2825,1594 v1(2885,1594)
IO0: J7.8 R8.1 R10.1 TP5.1 U1.30 | length 4909.2
  Top Layer w6: TP5.1 1425,1957 1399,1983 1322,1983 1284,1945 R8.1 1123,1995 1115,2003 1089,2003 1069,2023 1069,2129 1166,2226 1256,2226 1283.25,2253.25 1283.25,2535.25 1315,2567 2858,2567 2900.25,2524.75 J7.8 2897.71,2447.71 2897.71,2356.29 2908,2346 R10.1 2978,2215 3027,2166 3027,1316 2978,1267 2464,1267 2426.54,1304.46 U1.30
IO1: J7.7 R9.1 R11.1 TP8.1 U1.31 | length 4536.6
  Top Layer w6: TP8.1 1425,2020 1409,2004 1326,2004 1265,2065 R9.1 1124,2162 1168,2206 1262,2206 1299,2243 1299,2400 1297.25,2401.75 1297.25,2529.45 1317.8,2550 2700.5,2550 J7.7 2857,2393.5 2857,2073.8 2867.8,2063 R11.1 2995,2063 3011,2047 3011,1326 2974,1289 2488,1289 2458.54,1318.46 U1.31
IO2: J7.6 U1.32 | length 1902.4
  Top Layer w6: U1.32 2489.54,1331.46 2509,1312 2967,1312 2996,1341 2996,1985 2979,2002 2851,2002 2836,2017 2836,2314.5 J7.6
IO3: J7.5 U1.1 | length 1999.9
  Top Layer w6: U1.1 2594.92,1459.08 2612,1442 2612,1363 2639,1336 2958,1336 2981,1359 2981,1952 2956,1977 2610,1977 2595,1992 2595,2355 2603,2363 2603,2447.5 J7.5
IO4: J7.4 U1.2 | length 2007.9
  Top Layer w6: J7.4 2575,2375.5 2575,1981 2597,1959 2943,1959 2965,1937 2965,1368 2955,1358 2652,1358 2636,1374 2636,1464 2609.92,1490.08 U1.2
IO5: J7.3 U1.9 | length 749.6
  Top Layer w6: J7.3 2400.25,1933.75 2489.54,1844.46 U1.9
IO6: J7.2 U1.10 | length 778.2
  Top Layer w6: J7.2 2382,2368.5 2382,1902 2458.54,1825.46 U1.10
IO7: J7.1 U1.11 | length 806.4
  Top Layer w6: J7.1 2364,2286.5 2364,1872 2426.54,1809.46 U1.11
IO8: J5.10 U1.12 | length 935.7
  Top Layer w6: J5.10 2111.5,2379 2241,2379 2347,2273 2347,1841 2395.54,1792.46 U1.12
IO9: J5.9 U1.13 | length 1000.2
  Top Layer w6: J5.9 2048.5,2342 2240,2342 2330,2252 2330,1820 2363.54,1786.46 U1.13
MISO: J1.1 J5.6 U1.16 | length 1181
  Top Layer w6: J5.6 1827.92,2262.58 2054.42,2262.58 2099,2218 J1.1 2227,2073 2269.55,2030.45 U1.16
MOSI: J1.5 J5.7 U1.15 | length 2134.6
  Top Layer w6: J1.5 2049,2023 2049,2154 1968,2235 1789,2235 1593,2431 1593,2486 1611,2504 1686.5,2504 1903.5,2287 2220,2287 2300.54,2206.46 U1.15
NetC14_2: C14.2 U2.4 | length 129
  Top Layer w6: U2.4 C14.2
NetLED1_2: LED1.2 R4.2 | length 135
  Top Layer w20: LED1.2 R4.2
NetLED2_2: LED2.2 R5.2 | length 142
  Top Layer w20: LED2.2 R5.2
NetLED3_2: LED3.2 R6.2 | length 142
  Top Layer w20: LED3.2 R6.2
NetLED4_2: LED4.2 R10.2 | length 153.1
  Top Layer w20: LED4.2 2644,2215 R10.2
NetLED5_2: LED5.2 R11.2 | length 150
  Top Layer w20: LED5.2 R11.2
RESET: C7.1 C8.2 J1.3 J4.3 R7.1 SW3.1 SW3.2 U1.29 | length 7760.9
  Top Layer w6: SW3.2 250.16,2728.84 261,2718 499,2718 510,2729 SW3.1 564,2780 576,2792 576,2850 595,2869 C7.1 ; C7.1@660,2869 C8.2 865,2869 865,2689 894,2660 1018,2660 1034,2644 1034,2166 1054,2146 1054,1888 1265,1677 1591,1677 1627,1641 ; R7.1 1497,696 1419,618 1419,498 1446,471 1666,471 1700.25,505.25 J4.3 1704.25,550.25 1758,604 1834,604 1849,589 1849,467.51 1852.51,464 2945,464 2967,486 2967,1215 2939,1243 2447,1243 2395.54,1294.46 U1.29 ; R7.1@1504.75,734.24 1516,745.49 1573.49,745.49 1618,790 1618,1048 1576,1090 1576,1590 1627,1641 ; J1.3 1803,1977 1803,1671 1773,1641 1627,1641
RXD: R9.2 U2.3 | length 341.5
  Top Layer w6: U2.3 890,1883 915,1908 915,2043 937,2065 R9.2
SCK: J1.2 J5.5 U1.17 | length 1503.3
  Top Layer w6: J5.5 1779.5,2211 1934,2211 1999,2146 J1.2 1948,2022 1948,1929 1980,1897 2027,1897 2047,1917 2047,1999 2071,2023 2144,2023 2209.11,1957.89 U1.17
SS: J5.8 U1.14 | length 1064.5
  Top Layer w6: J5.8 1979.5,2311 2232,2311 2314.54,2228.46 2314.54,1808.46 2332.54,1790.46 U1.14
TXD: R8.2 U2.2 | length 190.4
  Top Layer w6: U2.2 940,1932 953,1945 R8.2
XTAL1: C3.2 R1.1 U1.7 Y1.1 | length 904
  Top Layer w6: U1.7 2918.08,1648.08 2949,1679 2949,1901 2941,1909 C3.2 2844,1909 2835,1900 R1.1 2803,1844 2795,1836 Y1.1
XTAL2: C5.2 R1.2 U1.8 Y1.3 | length 597.7
  Top Layer w6: U1.8@2574.26,1684.74 2579.92,1679.08 ; C5.2 2629,1909 2643,1895 ; R1.2 2680,1895 2643,1895 ; Y1.3 2684.44,1707 2615,1707 2587.08,1679.08 2579.92,1679.08 ; 2579.92,1679.08 U1.8 2546.12,1701.88 2532,1716 2532,1836.03 2545.97,1850 2631,1850 2643,1862 2643,1895
pads on no net: D1.4 D1.6 J2.4 J4.1 U1.3 U1.19 U1.22 U2.9 U2.10 U2.11 U2.12 U2.14 U2.15

## Polygon pours and split planes (outlines as drawn)
GND on Bottom Layer "GND_L02_P001" (solid, pour order 1): 40,2980 ccw(c99.96,2900.04) 20,2960 20,40 ccw(c100,100) 40,20 3070,20 ccw(c3070,30) 3080,30 3080,2960 ccw(c3000.06,2900.06) 3060,2980

## Keep-outs
Keep-Out Layer:
  the board outline again, w10

## Silkscreen, mask and mechanical layers (free items; w line width, h text height)
Top Overlay:
  text "USB" at 698,2332 h40
  text "IO1/RXD" at 1550,2210 h40
  text "ICSP" at 1995,2160 h40
  text "IO0/TX" at 2235,2145 h40
  text "IO1/RX" at 2235,1975 h40
  text "IO0/TXD" at 1525,1920 h40
  text "D+" at 1705,1620 h40
  text "+5V/USB" at 260,1560 h40
  text "USB" at 130,1460 h40
  text "5V" at 355,1460 h40
  text "D-" at 1710,1320 h40
  text "AD5/SCL" at 2550,1235 h40
  text "+5V/USB" at 200,1220 h40
  text "5V" at 608,1205 h40
  text "SENSE" at 265,1160 h40
  text "3P3V" at 530,1010 h40
  text "ARD_PWR" at 1610,1001.66 h40
  text "AD4/SDA" at 2535,930 h40
  text "+5V" at 435,345 h40
  text "+3P3V" at 885,340 h40
Bottom Overlay:
  text "ECEN5730  GOLDEN ARDIUNO" at 2895,2855 h60
  text "RUBAN FORD , 10-20-2025" at 2900,2584.99 h60
  text "CU, BOULDER, ECEE" at 2435,2284.99 h60
  text "ECEN5730_BRD3A, 10-20-2025" at 2590,374.99 h60
Mechanical 10:
  circle w0.5: c2900.25,550.25 r10
  circle w0.5: c2800.25,550.25 r10
  circle w0.5: c2700.25,550.25 r10
  circle w0.5: c2600.25,550.25 r10
  circle w0.5: c2500.25,550.25 r10
  circle w0.5: c2400.25,550.25 r10
  circle w0.5: c2200.25,550.25 r10
  circle w0.5: c2100.25,550.25 r10
  circle w0.5: c2000.25,550.25 r10
  circle w0.5: c1900.25,550.25 r10
  circle w0.5: c1800.25,550.25 r10
  circle w0.5: c1700.25,550.25 r10
  circle w0.5: c1600.25,550.25 r10
  circle w0.5: c1500.25,550.25 r10
  circle w0.5: c2900.25,2450.25 r10
  circle w0.5: c2800.25,2450.25 r10
  circle w0.5: c2700.25,2450.25 r10
  circle w0.5: c2600.25,2450.25 r10
  circle w0.5: c2500.25,2450.25 r10
  circle w0.5: c2400.25,2450.25 r10
  circle w0.5: c2300.25,2450.25 r10
  circle w0.5: c2200.25,2450.25 r10
  circle w0.5: c2041.43,2450.25 r10
  circle w0.5: c1941.43,2450.25 r10
  circle w0.5: c1841.43,2450.25 r10
  circle w0.5: c1741.43,2450.25 r10
  circle w0.5: c1641.43,2450.25 r10
  circle w0.5: c1541.43,2450.25 r10
  circle w0.5: c1441.43,2450.25 r10
  circle w0.5: c1341.43,2450.25 r10
  circle w0.5: c1241.43,2450.25 r10
  circle w0.5: c1141.43,2450.25 r10
  lines w0.5: 400.25,450.25 400.25,2551.76 2939.83,2551.76 3001.43,2490.16 3001.43,2040.25 3099.07,1940.25 3099.07,650.25 3001.43,550.25 3001.43,450.25 400.25,450.25

## Text inside footprints (layer, text, board x,y; h text height)
J4: Top Overlay "NC" at 1500.25,637.32 h30 r45; Top Overlay "IOREF" at 1590.25,628.64 h30 r45; Top Overlay "3v3" at 1800.25,637.32 h30 r45; Top Overlay "5v" at 1900.25,637.32 h30 r45; Top Overlay "GND" at 2000.25,637.32 h30 r45; Top Overlay "GND" at 2100.25,637.32 h30 r45; Top Overlay "Vin" at 2200.25,637.32 h30 r45; Top Overlay "RESET" at 1700.25,637.32 h30 r45
J5: Top Overlay "SCL" at 1111.25,2293.46 h30 r45; Top Overlay "SDA" at 1203.25,2293.46 h30 r45; Top Overlay "AREF" at 1279.25,2272.25 h30 r45; Top Overlay "GND" at 1406.25,2293.46 h30 r45; Top Overlay "D13" at 1512.25,2296.99 h30 r45; Top Overlay "D12" at 1603.25,2296.99 h30 r45; Top Overlay "D11~" at 1696.25,2275.78 h30 r45; Top Overlay "D10~" at 1797.25,2272.25 h30 r45; Top Overlay "D9~" at 1906.25,2289.92 h30 r45; Top Overlay "D8" at 2029.25,2314.66 h30 r45
J7: Top Overlay "D7" at 2181.25,2317.06 h30 r45; Top Overlay "D6~" at 2271.25,2292.32 h30 r45; Top Overlay "D4" at 2487.25,2315.25 h30 r45; Top Overlay "D3~" at 2571.25,2295.25 h30 r45; Top Overlay "D2" at 2684.25,2317.25 h30 r45; Top Overlay "D1" at 2791.25,2325.25 h30 r45; Top Overlay "D0" at 2881.25,2317.06 h30 r45; Top Overlay "D5~" at 2381.25,2292.32 h30 r45
J10: Top Overlay "A1" at 2498.25,622.25 h30 r45; Top Overlay "A0" at 2398.25,622.25 h30 r45; Top Overlay "A2" at 2598.25,619.32 h30 r45; Top Overlay "A3" at 2698.25,619.32 h30 r45; Top Overlay "A4" at 2798.25,619.32 h30 r45; Top Overlay "A5" at 2898.25,619.32 h30 r45